# Altium PCB chrg_station.PcbDoc
Units mm, origin at the board's own origin, x right, y up, seen from the top; angles counter-clockwise.
Board outline 152.4 x 101.6 mm, 2 copper layers (Top Layer, Bottom Layer); 8 components, 10 nets, 73 pads, 0 vias.
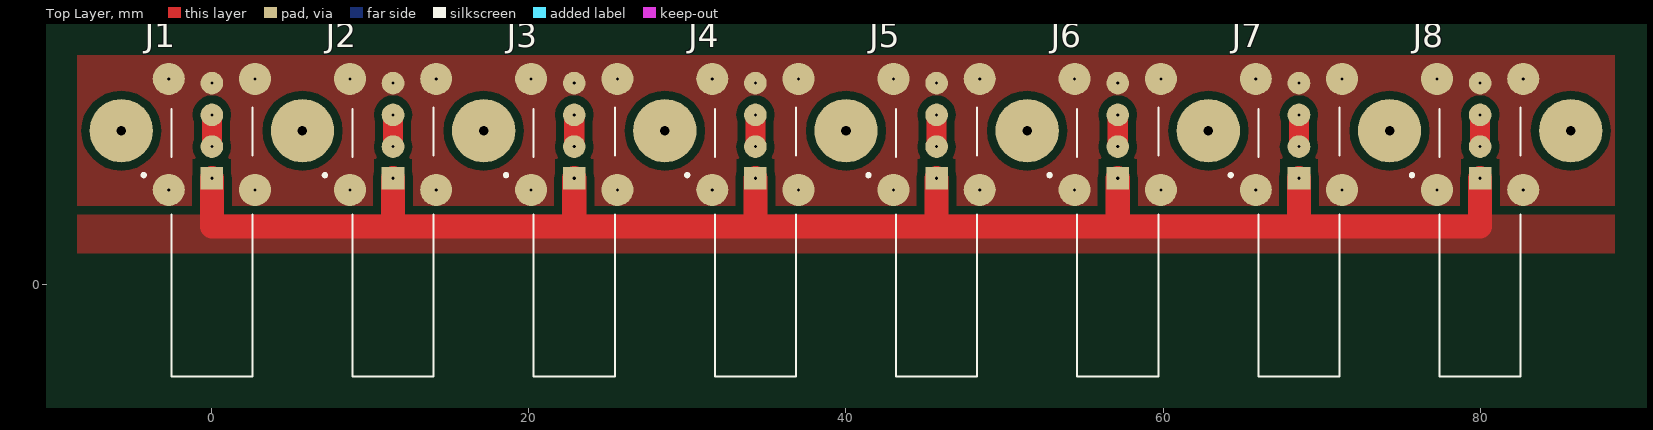
[diagram p0: Top Layer view]
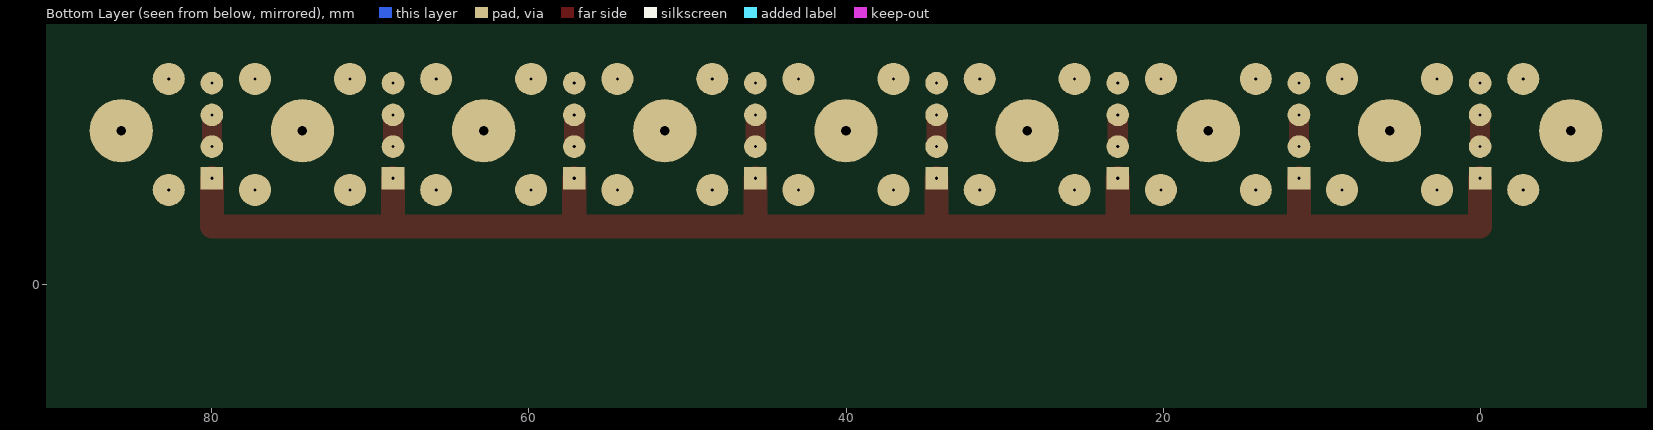
[diagram p1: Bottom Layer view, seen from below]

## Layer stack, top to bottom
Top Solder: solder mask 0.0102, Solder Resist, Dk 3.5
Top Layer: signal copper 0.0356
Dielectric 1: dielectric 0.32, FR-4, Dk 4.8
Bottom Layer: signal copper 0.0356
Bottom Solder: solder mask 0.0102, Solder Resist, Dk 3.5

## Board outline
-28.321,-30.607 124.079,-30.607 124.079,70.993 -28.321,70.993

## Design rules (kind name [scope] priority, off if disabled: settings)
Clearance [All] p1: gap=0.508 ignorepadtopadclearanceinfootprint=FALSE
PlaneConnect [All] p1: planeconnectstyle=Direct reliefexpansion=0.508 reliefentries=4 reliefconductorwidth=0.254 reliefairgap=0.254
PolygonConnect [All] p1: connectstyle=Direct reliefconductorwidth=0.254 reliefentries=4 polygonreliefangle="90 Angle" airgapwidth=0.254
RoutingVias [All] p1: holewidth=0.711 width=1.27 viastyle="Through Hole" minholewidth=0.711 minwidth=1.27 maxholewidth=0.711 maxwidth=1.27
SolderMaskExpansion [All] p1: expansion=0.102
Width [All] p1: maxlimit=12.7 minlimit=0.254 preferedwidth=0.254
29 further rules are at their usual default settings.

## Classes and differential pairs
component class chrg_station: J1 J2 J3 J4 J5 J6 J7

## Components (designator, comment, footprint, x,y, rotation, side; value= is the part's Value field where it differs from the comment)
J1 "292336-1" *TE_292336-1_292336-1(Primary) 0,6.731 r0 top
J2 "292336-1" *TE_292336-1_292336-1(Primary) 11.429,6.731 r0 top
J3 "292336-1" *TE_292336-1_292336-1(Primary) 22.857,6.731 r0 top
J4 "292336-1" *TE_292336-1_292336-1(Primary) 34.286,6.731 r0 top
J5 "292336-1" *TE_292336-1_292336-1(Primary) 45.714,6.731 r0 top
J6 "292336-1" *TE_292336-1_292336-1(Primary) 57.143,6.731 r0 top
J7 "292336-1" *TE_292336-1_292336-1(Primary) 68.571,6.731 r0 top
J8 "292336-1" *TE_292336-1_292336-1(Primary) 80,6.731 r0 top

## Footprints (in the part's own frame and the unit in brackets; to place one, negate y for a bottom-side part, rotate by r counter-clockwise, add the part's x,y. Pads: shape width x height; smd on the part's side, far side on the other; paste and mask are expansions set on the pad)
*TE_292336-1_292336-1(Primary) [mm]
  rect 1.428x1.428 hole 0.2: 1(0,0)
  round 1.428 hole 0.2: 2(0,2) 3(0,4) 4(0,6)
  round 2.025 hole 0.2: SH1(-2.72,-0.73) SH2(2.72,-0.73) SH3(2.72,6.27) SH4(-2.72,6.27)
  silkscreen extent -4.4,-12.49 2.56,4.46

## Part data
J1 J2 J3 J4 J5 J6 J7 J8: "Connector USB Receptacle 4 Position 2mm Solder Right Angle Thru-Hole 4 Terminal 1 Port Tube", Package=None, Availability=Unavailable, MF="TE Connectivity", MP=292336-1, Price=None, SnapEDA_Link=https://www.snapeda.com/parts/292336-1/TE%20Connectivity%20AMP%20Connectors/view-part/?ref=snap, TE_purchase_URL=https://www.te.com/usa-en/product-292336-1.html?te_bu=Cor&te_type=disp&te_campaign=seda_glo_cor-seda-global-disp-prtnr-fy19-seda-model-bom-cta_sma-317_1&elqCampaignId=32493

## Free pads (board coordinates)
  round 4 hole 0.6: 2(-5.714,9.731) 2(5.714,9.731) 2(17.143,9.731) 2(28.572,9.731) 2(40,9.731) 2(51.429,9.731) 2(62.857,9.731) 2(74.286,9.731) 2(85.714,9.731)

## Nets (pads, with @x,y where several pads share a name; then routed paths per layer and width w, separated by ;. In a path a pad name is that pad's centre, name@x,y a point inside that pad or via, vN(x,y) a via of type N, cw(c..) or ccw(c..) an arc to the next point about the centre after c; other vN are vias at no path point)
NetJ1_1: J1.1 J2.1 J3.1 J4.1 J5.1 J6.1 J7.1 J8.1 | length 104.4
  Top Layer w1.524: J1.1 0,3.683 11.429,3.683 ; J2.1 11.429,3.683 ; J3.1 22.857,3.683 ; J4.1 34.286,3.683 ; J5.1 45.714,3.683 ; J6.1 57.143,3.683 ; J7.1 68.571,3.683 ; J8.1 80,3.683 68.571,3.683 ; 11.429,3.683 22.857,3.683 ; 22.857,3.683 34.286,3.683 ; 34.286,3.683 45.714,3.683 ; 45.714,3.683 57.143,3.683 ; 57.143,3.683 68.571,3.683
NetJ1_2: J1.2 J1.3 | length 2
  Top Layer w1.27: J1.2 J1.3
NetJ1_4: J1.4 J1.SH1 J1.SH2 J1.SH3 J1.SH4 J2.4 J2.SH1 J2.SH2 J2.SH3 J2.SH4 J3.4 J3.SH1 J3.SH2 J3.SH3 J3.SH4 J4.4 J4.SH1 J4.SH2 J4.SH3 J4.SH4 J5.4 J5.SH1 J5.SH2 J5.SH3 J5.SH4 J6.4 J6.SH1 J6.SH2 J6.SH3 J6.SH4 J7.4 J7.SH1 J7.SH2 J7.SH3 J7.SH4 J8.4 J8.SH1 J8.SH2 J8.SH3 J8.SH4
NetJ2_2: J2.2 J2.3 | length 2
  Top Layer w1.27: J2.2 J2.3
NetJ3_2: J3.2 J3.3 | length 2
  Top Layer w1.27: J3.2 J3.3
NetJ4_2: J4.2 J4.3 | length 2
  Top Layer w1.27: J4.2 J4.3
NetJ5_2: J5.2 J5.3 | length 2
  Top Layer w1.27: J5.2 J5.3
NetJ6_2: J6.2 J6.3 | length 2
  Top Layer w1.27: J6.2 J6.3
NetJ7_2: J7.2 J7.3 | length 2
  Top Layer w1.27: J7.2 J7.3
NetJ8_2: J8.2 J8.3 | length 2
  Top Layer w1.27: J8.2 J8.3

## Polygon pours and split planes (outlines as drawn)
NetJ1_1 on Top Layer (solid, remove dead copper, pour order 2): -8.5,2 88.5,2 88.5,4.431 -8.5,4.431
NetJ1_4 on Top Layer (solid, remove dead copper, pour order 1): -8.5,14.5 88.5,14.5 88.5,5 -8.5,5